# EAGLE board glove (EAGLE 6.6.0)

Size 63.5 x 38.1 mm. Coordinates in mm from the lower left corner, seen from the top.
Outline: 0,0 63.5,0 63.5,38.1 0,38.1 0,0
Copper layers (1*16): Top 0.035mm / dielectric 1.5mm / Bottom 0.035mm
Design rules "default": minimum track width 10mil, minimum drill 24mil, track to track 8mil, track to pad 8mil, pad to pad 8mil, via to via 8mil, smd to smd 8mil, copper to edge 40mil, drill to drill 8mil, minimum pad ring 10mil, minimum via ring 8mil, stop-mask expansion 4mil, vias tented up to drill 0mil, thermal gap 10mil

## Footprints (pad centres in the part's own frame; a part is rotated, then mirrored left to right if it is on the bottom)
FRACTUS-ANTENNA-FR05-S1-N-0-102 = smd 1.5 x 2.6: 1 -2.55,0; 2 2.55,0
BAL-NRF01D3 = smd 0.22 x 0.22: ANT1 -0.517,-0.25; ANT2 -0.517,0.25; GND 0.083,0.25; SE 0.516,0; VCC 0.083,-0.25
0603_CAP = smd 0.7 x 1: 1 -0.65,0; 2 0.65,0
C0603 = smd 1.1 x 1: 1 -0.85,0; 2 0.85,0
0402_CAP = smd 0.536 x 0.546: 1 -0.433,0; 2 0.433,0
USB_MICRO_B-JST-MC5BR3-M404-4S-TB = smd 0.4 x 1.45: 1 -1.3,3.875; 2 -0.65,3.875; 3 0,3.875; 4 0.65,3.875; 5 1.3,3.875 | smd 1.7 x 2.2: P$1 -4.9,0; P$2 4.9,0 | smd 1.7 x 1.8: P$3 -4.9,2.4; P$4 4.9,2.4 | smd 1.2 x 1.45: P$5 -2.35,3.875; P$6 2.35,3.875
LED-0603 = smd 0.8 x 0.8: A 0,-0.75; C 0,0.75
R0603 = smd 1 x 1.1: 1 -0.85,0; 2 0.85,0
0603-RES = smd 0.7 x 1: 1 -0.65,0; 2 0.65,0
LGA28R50P4X10_380X520X100 = smd 0.3 x 0.525: 1 -2.25,1.562; 6 -2.25,-1.562; 7 -1.75,-1.562; 8 -1.25,-1.562; 9 -0.75,-1.562; 10 -0.25,-1.562; 11 0.25,-1.562; 12 0.75,-1.562; 13 1.25,-1.562; 14 1.75,-1.562; 15 2.25,-1.562; 20 2.25,1.562; 21 1.75,1.562; 22 1.25,1.562; 23 0.75,1.562; 24 0.25,1.562; 25 -0.25,1.562; 26 -0.75,1.562; 27 -1.25,1.562; 28 -1.75,1.562 | smd 0.425 x 0.3: 2 -2.312,0.75; 3 -2.312,0.25; 4 -2.312,-0.25; 5 -2.312,-0.75; 16 2.312,-0.75; 17 2.312,-0.25; 18 2.312,0.25; 19 2.312,0.75
QFN-48-6MM = smd 0.8 x 0.203: 1 -3,2.2; 2 -3,1.8; 3 -3,1.4; 4 -3,1; 5 -3,0.6; 6 -3,0.2; 7 -3,-0.2; 8 -3,-0.6; 9 -3,-1; 10 -3,-1.4; 11 -3,-1.8; 12 -3,-2.2; 25 3,-2.2; 26 3,-1.8; 27 3,-1.4; 28 3,-1; 29 3,-0.6; 30 3,-0.2; 31 3,0.2; 32 3,0.6; 33 3,1; 34 3,1.4; 35 3,1.8; 36 3,2.2 | smd 0.203 x 0.8: 13 -2.2,-3; 14 -1.8,-3; 15 -1.4,-3; 16 -1,-3; 17 -0.6,-3; 18 -0.2,-3; 19 0.2,-3; 20 0.6,-3; 21 1,-3; 22 1.4,-3; 23 1.8,-3; 24 2.2,-3; 37 2.2,3; 38 1.8,3; 39 1.4,3; 40 1,3; 41 0.6,3; 42 0.2,3; 43 -0.2,3; 44 -0.6,3; 45 -1,3; 46 -1.4,3; 47 -1.8,3; 48 -2.2,3 | smd 4.6 x 4.6: GND 0,0
SOT23-5 = smd 0.55 x 1.2: 1 -0.95,-1.3; 2 0,-1.3; 3 0.95,-1.3; 4 0.95,1.3; 5 -0.95,1.3
QT1070 = smd 1.422 x 0.711: P$1 -3.175,3.81; P$2 -3.175,2.54; P$3 -3.175,1.27; P$4 -3.175,0; P$5 -3.175,-1.27; P$6 -3.175,-2.54; P$7 -3.175,-3.81; P$8 3.175,3.81; P$9 3.175,2.54; P$10 3.175,1.27; P$11 3.175,0; P$12 3.175,-1.27; P$13 3.175,-2.54; P$14 3.175,-3.81
TXC-8Y = smd 0.8 x 0.7: 1 -0.65,-0.5; 2 0.65,-0.5; 3 0.65,0.5; 4 -0.65,0.5
ABS05 = smd 0.5 x 1: A -0.55,0; B 0.55,0

## Placement (x,y rotation side)
A1  FRACTUS-2.4GHZ-FR05-S1-N-0-102  [FRACTUS-ANTENNA-FR05-S1-N-0-102]  60.96,15.24 90 top
B1  BAL-NRF01D3  [BAL-NRF01D3]  53.34,12.7 0 top
C1  [0603_CAP]  15.24,3.81 270 top
C2  [0603_CAP]  11.43,2.54 0 top
C3  [0603_CAP]  9.14,15.88 90 top
C4  [0603_CAP]  22.86,1.27 0 top
C13  100 nF  [C0603]  21.59,35.56 90 top
C14  100 nF  [C0603]  17.78,35.56 90 top
C15  120 nF  [C0603]  2.54,33.02 0 top
C16  6.8 nF  [C0603]  25.4,35.56 90 top
C17  12 pF  [0402_CAP]  22.86,27.94 0 top
C18  12 pF  [0402_CAP]  38.1,30.48 0 top
C19  12 pF  [0402_CAP]  45.72,29.21 180 top
C20  12 pF  [0402_CAP]  45.72,24.13 180 top
C21  2.2 nF  [0402_CAP]  45.72,22.86 0 top
C22  1.0 nF  [0402_CAP]  50.8,24.13 90 top
C24  0.8 pF  [0402_CAP]  53.34,24.13 90 top
C25  100 nF  [0402_CAP]  43.18,8.89 0 top
C27  1.0 nF  [0402_CAP]  46.99,7.62 0 top
C28  47 nF  [0402_CAP]  52.07,7.62 0 top
C29  4.7 uF  [0603_CAP]  50.8,5.08 0 top
C30  1.0 uF  [0603_CAP]  57.15,3.81 0 top
J1  MICRO_USB_B_JST_MC5BR3-M404-4S  [USB_MICRO_B-JST-MC5BR3-M404-4S-TB]  1.91,17.78 270 top
L9  15 nH  [0402_CAP]  52.07,20.32 90 top
L10  10 uH  [0603_CAP]  41.91,20.32 0 top
LED1  LED0603  [LED-0603]  21.59,6.35 0 top
LED2  LED0603  [LED-0603]  55.88,20.32 0 top
R1  10 K  [R0603]  31.75,29.21 90 top
R2  10 K  [R0603]  27.94,29.21 90 top
R3  10 K  [R0603]  22.86,31.75 90 top
R4  [0603-RES]  50.8,2.54 0 top
R5  [0603-RES]  35.56,3.81 0 top
R6  [0603-RES]  12.7,19.05 0 top
R7  [0603-RES]  10.67,15.88 270 top
R8  [0603-RES]  24.13,22.86 0 top
R9  [0603-RES]  24.13,20.32 0 top
R10  [0603-RES]  24.13,16.51 0 top
R11  [0603-RES]  33.02,10.16 0 top
R12  [0603-RES]  35.56,12.7 0 top
R13  [0603-RES]  36.83,8.89 0 top
R14  [0603-RES]  36.83,6.35 0 top
R15  [0603-RES]  29.21,2.54 0 top
R16  [0603-RES]  33.02,1.27 0 top
R17  [0603-RES]  26.67,7.62 0 top
R18  [0603-RES]  25.4,10.16 0 top
U1  BNO055  [LGA28R50P4X10_380X520X100]  31.75,35.56 0 top
U3  NRF51822QF  [QFN-48-6MM]  46.99,17.78 0 top
U4  MCP73831  [SOT23-5]  13.97,11.43 0 top
U$1  COMMS  [QT1070]  31.75,21.59 0 top
X2  [TXC-8Y]  46.99,26.67 90 top
X3  ABS05-32.768KHZ-9-T  [ABS05]  39.37,26.67 0 top

## Library data of the parts
A1 = chips; RICHARDSON_RFPD: FR05-S1-N-0102B
B1 = chips; DIGIKEY: 497-13637-1-ND; MOUSER: 511-BAL-NRF01D3
C1-C4 C17-C22 C24 C25 C27-C30 L9 L10 R4-R18 = passives
C13-C16 R1-R3 = rcl
J1 = connector; DIGIKEY: 455-2567-2-ND; MOUSER: 53X3655
LED1 LED2 = leds
U1 = BNO055; AVAILABILITY: Good; DESCRIPTION: BNO055 9-axis Absolute Orientation Sensor ( SiP ) w/Sensors and Sensor Fusion; MF: Bosch; MP: BNO055; PACKAGE: LGA-28 Bosch; PRICE: 9.48 USD
U3 = chips; DIGIKEY: 1490-1032-1-ND; MOUSER: 949-NRF51822-QFAB-R7
U4 = SparkFun-PowerIC
U$1 = QT1070
X2 = crystals
X3 = crystals; DIGIKEY: 535-11897-1-ND

## Nets
GND: B1.GND C1.2 C2.2 C3.2 C4.2 C17.2 C18.2 C19.2 C20.2 C21.2 C22.2 C24.2 C25.2 C27.2 C28.2 C29.2 C30.2 J1.5 R4.1 R5.1 R7.1 U1.5 U1.6 U1.17 U3.13 U3.33 U3.34 U3.GND U4.2 U$1.P$2 U$1.P$14
GNDIO: C13.2 C14.2 C15.2 C16.2 U1.2 U1.10 U1.15 U1.16 U1.18 U1.25
INT: U1.14
N$1: C2.1 C3.1 U4.3
N$2: LED1.A R6.1
N$3: LED1.C U4.1
N$4: R7.2 U4.5
N$6: R12.2 U$1.P$7
N$7: R12.1
N$8: R13.2 U$1.P$8
N$9: C13.1 U1.9
N$10: R13.1
N$11: R14.2 U$1.P$9
N$13: R14.1
N$14: L10.2 U3.2
N$15: L9.2 L10.1
N$16: C27.1 C30.1 L9.1 U3.35 U3.36
N$17: R9.1 U$1.P$5
N$18: R3.1 U1.4
N$19: R4.2 U3.23
N$20: C20.1 U3.38 X2.3
N$21: B1.ANT1 U3.31
N$22: B1.ANT2 U3.32
N$23: B1.VCC C21.1 U3.30
N$24: A1.1 B1.SE C24.1
N$25: C28.1 U3.29
N$26: C22.1 U3.39
N$27: C17.1 U3.45 X3.A
N$28: C18.1 U3.46 X3.B
N$29: C19.1 U3.37 X2.1
N$30: R5.2 U3.24
N$31: R15.2 U$1.P$10
N$32: R15.1
N$33: R16.2 U$1.P$11
N$34: R16.1
N$35: R17.2 U$1.P$12
N$36: R17.1
N$37: R18.2 U$1.P$13
N$38: C1.1 J1.1 R6.2 U4.4
N$39: R18.1
N$40: R8.1 U$1.P$4
SCL: R1.1 R11.1 U1.19 U$1.P$6
SDA: R2.1 R10.1 U1.20 U$1.P$3
VCC: C4.1 C25.1 C29.1 R8.2 R9.2 R10.2 R11.2 U3.1 U3.12 U$1.P$1
VDD: C14.1 C15.1 C16.1 R1.2 R2.2 R3.2 U1.3 U1.28

## Tracks (layer width: path | path; a pad name or v marks a point on that pad's centre or on a via)
GND  (30 unrouted)
GNDIO  (9 unrouted)
N$1  (2 unrouted)
N$2  (1 unrouted)
N$3  (1 unrouted)
N$4  (1 unrouted)
N$6  (1 unrouted)
N$8  (1 unrouted)
N$9  (1 unrouted)
N$11  (1 unrouted)
N$14  (1 unrouted)
N$15  (1 unrouted)
N$16  (4 unrouted)
N$17  (1 unrouted)
N$18  (1 unrouted)
N$19  (1 unrouted)
N$20  (2 unrouted)
N$21  (1 unrouted)
N$22  (1 unrouted)
N$23  (2 unrouted)
N$24  (2 unrouted)
N$25  (1 unrouted)
N$26  (1 unrouted)
N$27  (2 unrouted)
N$28  (2 unrouted)
N$29  (2 unrouted)
N$30  (1 unrouted)
N$31  (1 unrouted)
N$33  (1 unrouted)
N$35  (1 unrouted)
N$37  (1 unrouted)
N$38  (3 unrouted)
N$40  (1 unrouted)
SCL  (3 unrouted)
SDA  (3 unrouted)
VCC  (9 unrouted)
VDD  (7 unrouted)